# Altium PCB 枪盒主板-20201219.PcbDoc (part 1 of 2)
Units mm, origin at the board's own origin, x right, y up, seen from the top; angles counter-clockwise.
Board outline 78 x 44 mm, 2 copper layers (Top Layer, Bottom Layer); 79 components, 65 nets, 287 pads, 240 vias.
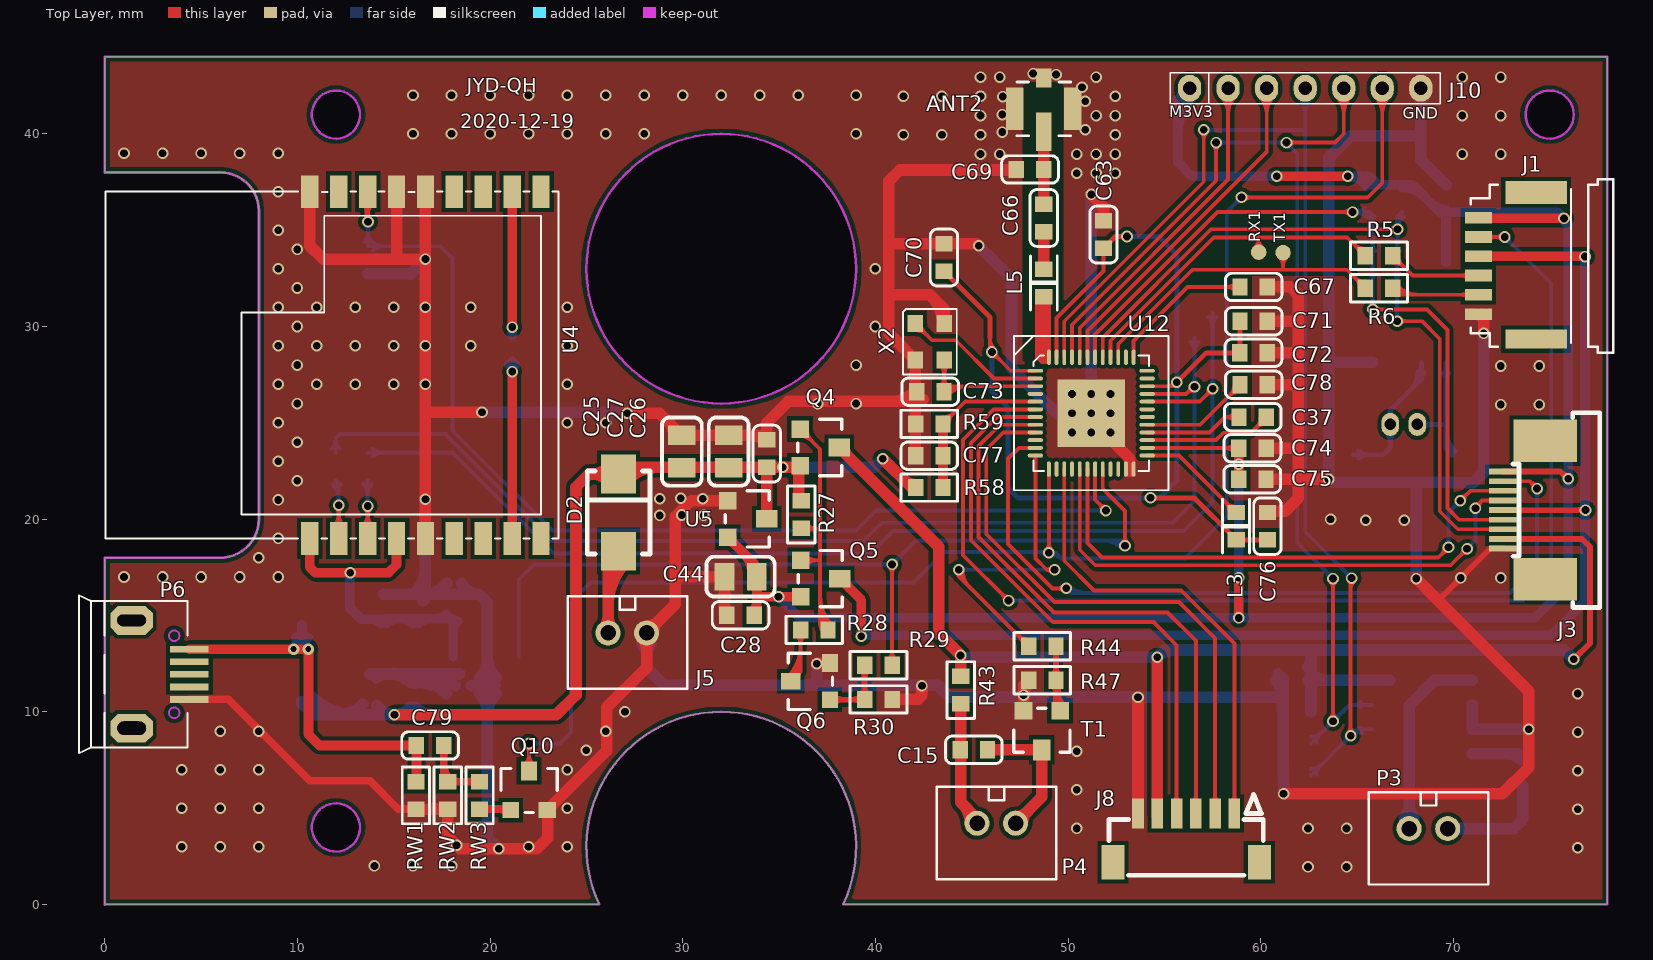
[diagram p0: Top Layer view]
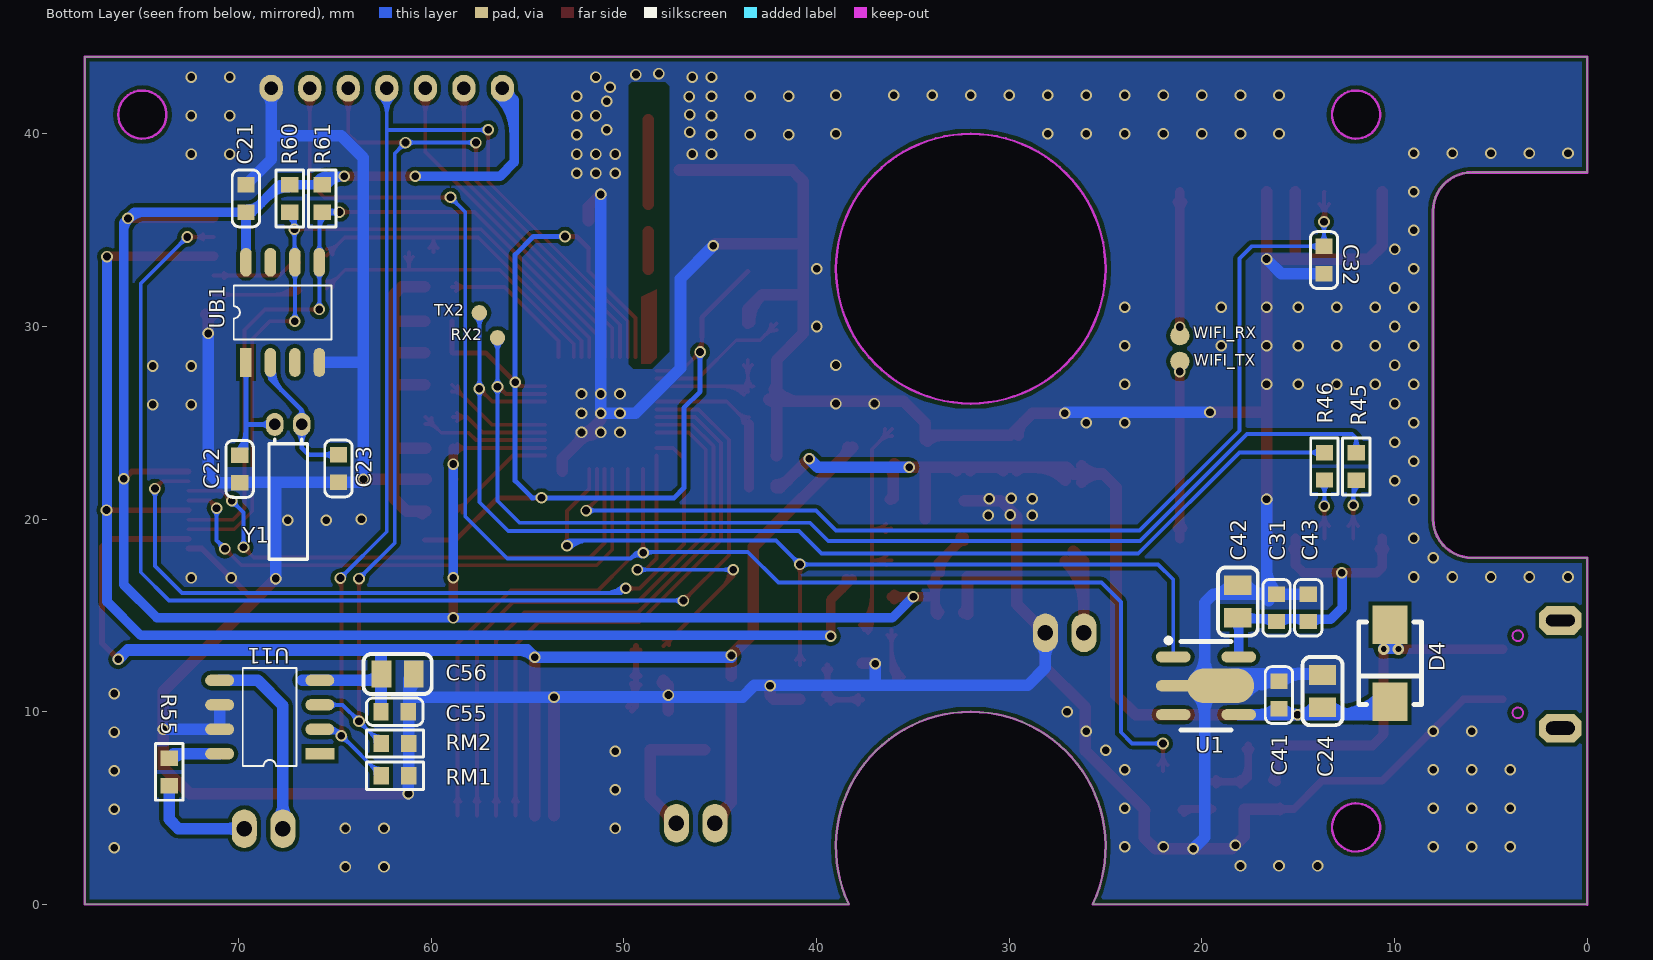
[diagram p1: Bottom Layer view, seen from below]
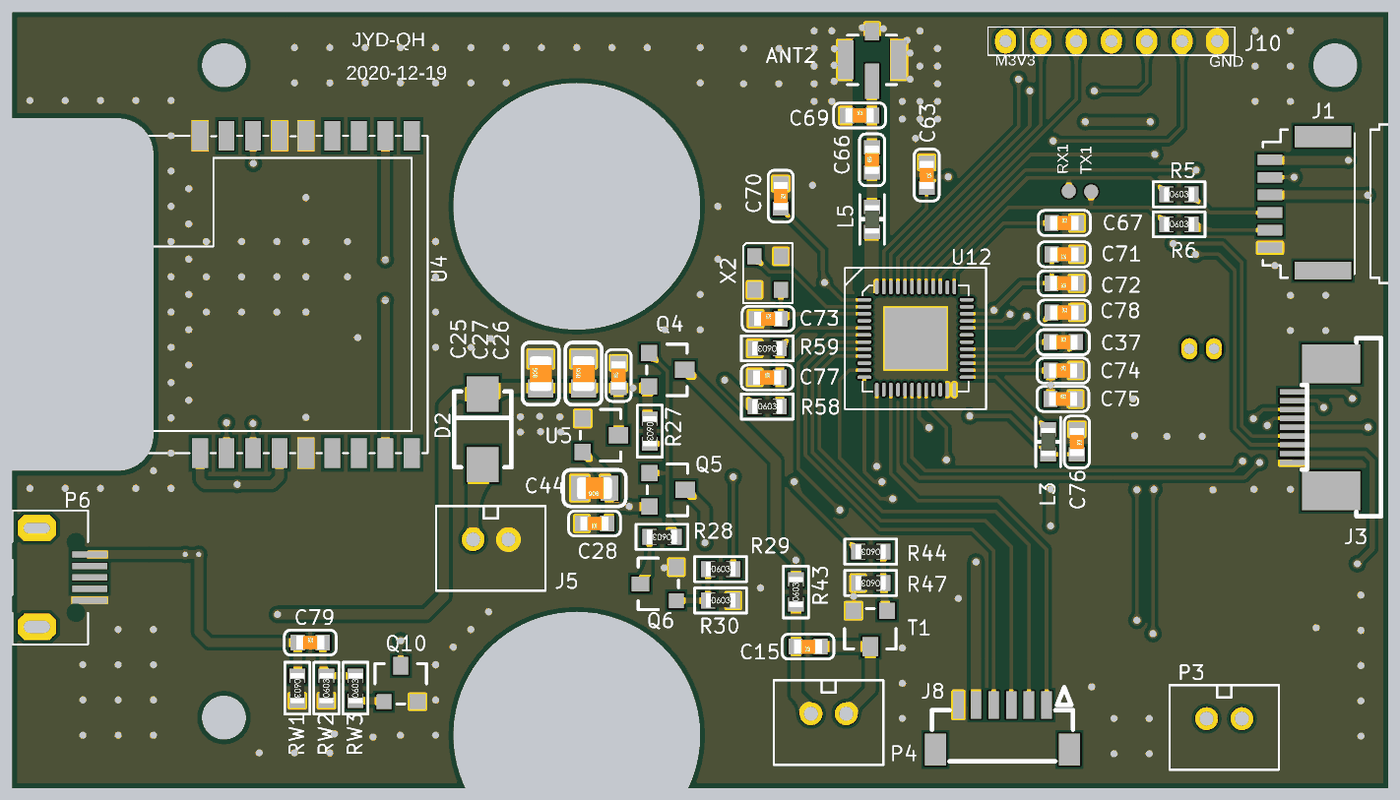
[diagram p3: 3D render of the assembled board from above, using the file's embedded part models]
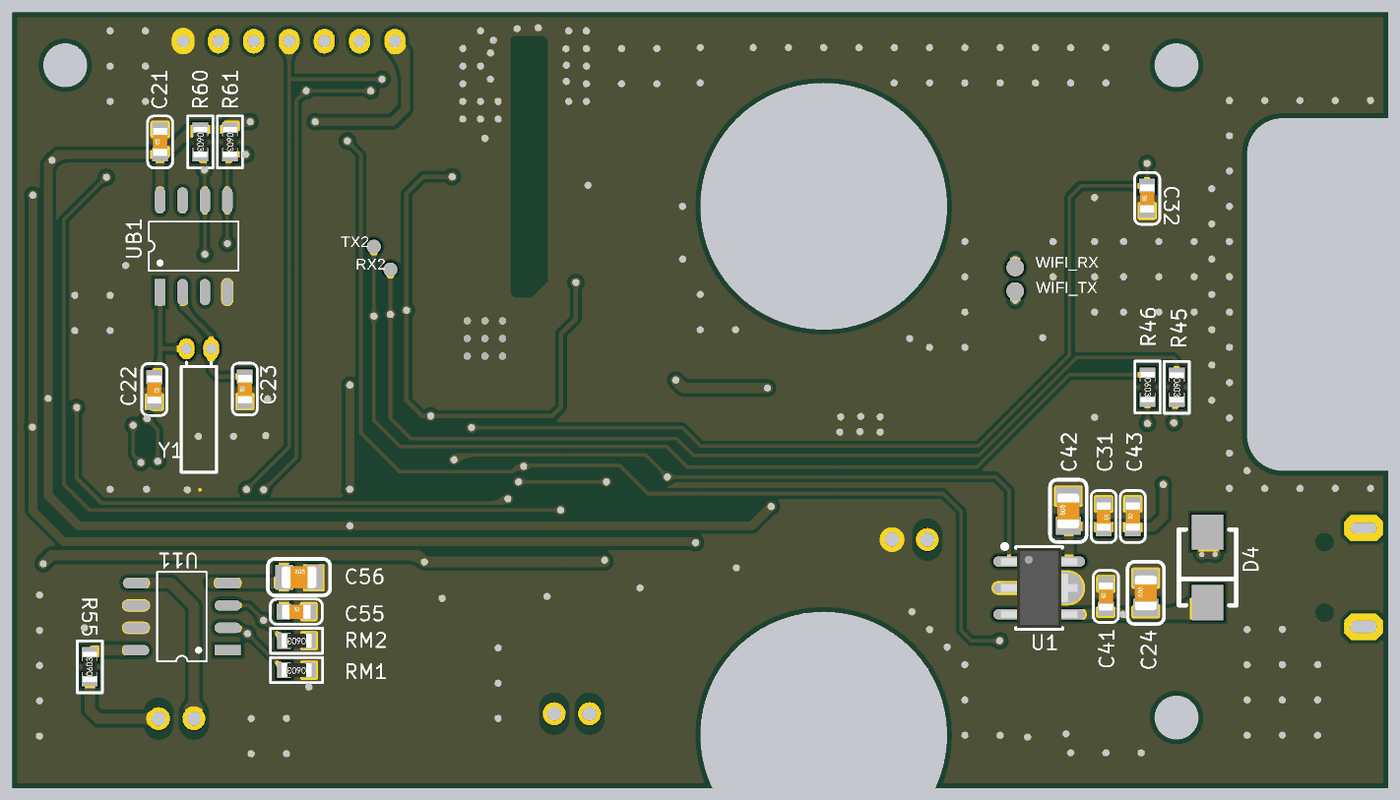
[diagram p4: 3D render of the assembled board from below, using the file's embedded part models]

## Layer stack, top to bottom
Top Layer: signal copper 0.0356
Dielectric: dielectric 0.32, FR-4, Dk 4.8
Bottom Layer: signal copper 0.0356

## Board outline
0,0 0,18 6,18 ccw(c6,20) 8,20 8,36 ccw(c6,36) 6,38 0,38 0,44 78,44 78,0 38.325,0 ccw(c32,3) 25.675,0
cut-out: 32,26 cw(c32,33) 25,33 cw(c32,33) 32,40 cw(c32,33) 39,33 cw(c32,33)
cut-out: 75,39.75 cw(c75,41) 73.75,41 cw(c75,41) 75,42.25 cw(c75,41) 76.25,41 cw(c75,41)
cut-out: 12,39.75 cw(c12,41) 10.75,41 cw(c12,41) 12,42.25 cw(c12,41) 13.25,41 cw(c12,41)
cut-out: 12,2.75 cw(c12,4) 10.75,4 cw(c12,4) 12,5.25 cw(c12,4) 13.25,4 cw(c12,4)

## Design rules (kind name [scope] priority, off if disabled: settings)
Clearance Clearance_1 [All] p1: gap=0.1
Clearance [All] p2 off: gap=0.2
ComponentClearance [All] p1: gap=0 collisioncheckmode=3 verticalgap=0 showdistances=FALSE
HoleSize [All] p1: absolutevalues=TRUE maxlimit=10 minlimit=0.025 maxpercent=80.000 minpercent=20.000
HoleToHoleClearance [All] p1: gap=0 allowstackedmicrovias=TRUE
MinimumSolderMaskSliver [All] p1: minsoldermaskwidth=0
PolygonConnect [All] p1: connectstyle=Direct reliefconductorwidth=0.254 reliefentries=4 polygonreliefangle="90 Angle" airgapwidth=0.254
RoutingVias [All] p1: holewidth=0.4 width=0.6 viastyle="Through Hole" minholewidth=0.3 minwidth=0.5 maxholewidth=0.4 maxwidth=0.6
ShortCircuit [All] p1: allowed=TRUE
SilkToSilkClearance [All] p1: silktosilkclearance=0
SilkToSolderMaskClearance [IsPad] p1: minsilkscreentomaskgap=0 clearancetoexposedcopper=TRUE
SolderMaskExpansion [All] p1: expansion=0.102
Width [All] p1: maxlimit=2 minlimit=0.1 preferedwidth=0.2
21 further rules are at their usual default settings.

## Classes and differential pairs
component class 枪盒主板: ANT2 C15 C21 C22 C23 C24 C31 C32 C37 C41 C42 C43 C55 C56 C63 C66 C67 C69 C70 C71 C72 C73 C74 C75 C76 C77 C78 C79 J1 J3 J5 J8 J10 L3 L5 P3 P4 P6 Q10 R5 R6 R43 R44 R45 R46 R47 R55 R58 R59 R60 R61 RM1 RM2 RW1 RW2 RW3 T1 U1 U4 U11 U12 UB1 X2 Y1

## Components (designator, comment, footprint, x,y, rotation, side; value= is the part's Value field where it differs from the comment)
ANT2 "ANT" ANT 48.742,41.301 r0 top
C15 "10uF/10V" 0603C 45.11,8.027 r180 top
C21 "0.1uF" 0603C 69.621,36.65 r90 bottom
C22 "22pF" 0603C 69.951,22.607 r270 bottom
C23 "22pF" 0603C 64.82,22.632 r90 bottom
C24 "10uF/16V" 0805C 13.741,11.074 r90 bottom
C25 "10uF/16V" 0805C 29.955,23.508 r90 top
C26 "100nF" 0603C 34.366,23.406 r90 top
C27 "220uF/10V" 0805C 32.385,23.508 r90 top
C28 "100nF" 0603C 33.007,15.012 r180 top
C31 "10uF" 0603C 16.129,15.402 r270 bottom
C32 "10uF" 0603C 13.665,33.452 r90 bottom
C37 "100nF" 0603C 59.588,25.299 r0 top
C41 "100nF" 0603C 16.002,10.871 r90 bottom
C42 "22uF/10V" 0805C 18.136,15.723 r90 bottom
C43 "100nF" 0603C 14.478,15.402 r90 bottom
C44 "10uF/16V" 0805C 33.007,17.018 r180 top
C55 "0.1uF" 0603C 61.899,10.008 r180 bottom
C56 "22uF" 0805C 61.747,11.964 r180 bottom
C63 "1uF" 0603C 51.841,34.773 r270 top
C66 "1.5pF" 0603C 48.742,35.637 r90 top
C67 "100nF" 0603C 59.639,32.055 r0 top
C69 "1pF" 0603C 48.031,38.151 r0 top
C70 "100nF" 0603C 43.56,33.579 r270 top
C71 "100nF" 0603C 59.639,30.277 r180 top
C72 "1uF" 0603C 59.624,28.636 r180 top
C73 "12pF" 0603C 42.849,26.62 r0 top
C74 "100nF" 0603C 59.573,23.683 r0 top
C75 "10uF" 0603C 59.562,22.073 r0 top
C76 "10uF" 0603C 60.35,19.635 r270 top
C77 "1nF" 0603C 42.798,23.292 r0 top
C78 "100nF" 0603C 59.639,26.975 r0 top
C79 "10uF" 0603C 16.891,8.255 r0 top
D2 "SS14" DO-214AA 26.67,20.345 r270 top
D4 "SS14" DO-214AA 10.236,12.522 r90 bottom
J1 "" SM06B-SRSS-TB 71.297,33.148 r90 top
J3 "触摸板接口" FPC-0.5-9P 73.685,20.473 r90 top
J5 "电池盒" B2B-PH 27.127,14.097 r0 top
J8 "设置板接口" 6P-1mm 56.133,3.455 r0 top
J10 "7P" 7P-2.0MM 56.311,42.368 r0 top
L3 "2.2UH" 0603L 58.724,19.635 r270 top
L5 "2nH" 0603L 48.742,32.259 r270 top
P3 "电机接口" B2B-PH 68.706,3.938 r0 top
P4 "蜂鸣器接口" B2B-PH 46.278,4.217 r0 top
P6 "MICROUSB" MICRO-USB_F-B 2.794,11.95 r270 top locked
Q4 "SI2301" "SOT-23 - GDS" 37.109,23.724 r270 top
Q5 "SI2301" "SOT-23 - GDS" 37.135,16.916 r270 top
Q6 "PMBT3904" "SOT-23 - BCE" 36.627,11.582 r90 top
Q10 "PMBT3904" "SOT-23 - BCE" 22.022,5.918 r0 top
R5 "22R" 0603R 66.141,33.681 r0 top
R6 "22R" 0603R 66.141,31.979 r0 top
R27 "100K" 0603R 36.144,20.244 r270 top
R28 "1K" 0603R 36.83,14.249 r180 top
R29 "4.7K" 0603R 40.157,12.421 r0 top
R30 "10K" 0603R 40.157,10.643 r0 top
R43 "10R" 0603R 44.424,11.126 r90 top
R44 "200R" 0603R 48.666,13.412 r180 top
R45 "22R" 0603R 11.989,22.733 r270 bottom
R46 "22R" 0603R 13.641,22.744 r270 bottom
R47 "10K" 0603R 48.666,11.634 r180 top
R55 "2.2R" 0603R 73.609,6.884 r90 bottom
R58 "510%1" 0603R 42.798,21.641 r0 top
R59 "100K%1" 0603R 42.798,24.943 r180 top
R60 "10K" 0603R 67.34,36.65 r270 bottom
R61 "10K" 0603R 65.658,36.65 r270 bottom
RM1 "10K" 0603R 61.885,6.691 r0 bottom
RM2 "10K" 0603R 61.885,8.356 r0 bottom
RW1 "100K" 0603R 16.154,5.664 r270 top
RW2 "100K" 0603R 17.805,5.664 r90 top
RW3 "100R" 0603R 19.456,5.664 r90 top
T1 "SS8050" SOT-23-3L 48.64,9.043 r180 top
U1 "ME6217C33P5" LC-SOT-89-5 19.787,11.354 r0 bottom
U4 "TYWE1S" WIFI_Module_TYWE1S 23.546,18.999 r90 top
U5 "HT7533-1" SOT-23-3L 33.35,20.015 r270 top
U11 "CP2117" SOP8 68.387,9.728 r0 bottom
U12 "BK3435QFN48_A" QFN48_6*6*0.4 51.206,25.502 r0 top
UB1 "PCF8563" SOP8 67.716,30.735 r90 bottom
X2 "16MHZ" XTAL3225 42.824,29.211 r270 top
Y1 "32.768KHZ" 晶振-9 66.725,24.918 r0 bottom

## Footprints (in the part's own frame and the unit in brackets; to place one, negate y for a bottom-side part, rotate by r counter-clockwise, add the part's x,y. Pads: shape width x height; smd on the part's side, far side on the other; paste and mask are expansions set on the pad)
6P-1mm [mm]
  rect 0.6x1.55 smd: 1(2.5,1.262) 2(1.5,1.262) 3(0.5,1.262) 4(-0.5,1.262) 5(-1.5,1.262) 6(-2.5,1.262)
  rect 1.2x1.8 smd: 7(-3.8,-1.262) 8(3.8,-1.262)
  silkscreen extent -4,-1.94 4,2.26
7P-2.0MM [mm]
  oval 1.2x1.4 hole 0.7 mask+0.05: 1(0,0) 2(2,0) 3(4,0) 4(6,0) 5(8,0) 6(10,0) 7(12,0)
  silkscreen extent -1,-0.8 13,0.8
0603C [mm]
  rect 0.8x0.9 smd: 1(-0.711,0) 2(0.711,0)
  silkscreen extent -1.47,-0.71 1.47,0.71, body extent -0.8,-0.4 0.8,0.4, height 0.3
0603L [mm]
  rect 0.8x0.9 smd: 1(-0.711,0) 2(0.711,0)
  silkscreen extent -1.4,-0.7 1.4,0.7, body extent -0.82,-0.41 0.83,0.41, height 0.46
0603R [mm]
  rect 0.8x0.9 smd: 1(-0.711,0) 2(0.711,0)
  silkscreen extent -1.47,-0.71 1.47,0.71, body extent -0.85,-0.4 0.85,0.4, height 0.56
0805C [mil]
  rect 40x56 smd: 1(-33,0) 2(33,0)
  silkscreen extent -70,-41 70,41, body extent -39,-25 39,25, height 30
ANT [mm]
  rect 0.8x2 smd: 1(0,-1.2)
  rect 0.9x2.2 smd: 2(-1.5,0) 3(1.5,0)
  rect 0.8x1 smd: 4(0,1.6)
  silkscreen extent -1.4,-1.4 1.4,1.4
B2B-PH [mm]
  round 1.3 / inner oval 1.3x2 / far side oval 1.3x2 hole 0.8 mask+0.05: 1(-1,0) 2(1,0)
  silkscreen extent -3.1,-2.9 3.1,1.9
DO-214AA [mm]
  rect 2x1.8 smd: 1(2,0) 2(-2,0)
  silkscreen extent -2.15,-1.63 2.15,1.63
FPC-0.5-9P [mil]
  rect 11.8x59 smd: 1(-78.72,42.72) 2(-59.02,42.72) 3(-39.32,42.72) 5(-0.02,42.72) 6(19.67,42.72) 7(39.35,42.72) 8(59.03,42.72) 9(78.72,42.72)
  rect 11.9x59 smd: 4(-19.67,42.72)
  rect 86.6x129.9 smd: 10(-141.72,-42.73) 11(141.72,-42.73)
  silkscreen extent -199,-154 199,23
LC-SOT-89-5 [mm]
  oval 1.8x0.58 smd: 1(1.7,-1.5) 3(1.7,1.5) 4(-1.7,1.5) 5(-1.7,-1.5)
  oval 3.5x1.8 smd: 2(-0.75,0)
  oval 2.4x0.58 smd: 2(1.4,0)
  silkscreen extent -1.3,-2.47 2.07,2.3, body extent -2.17,-2.25 2.18,2.25, height 1.5
MICRO-USB_F-B [mm]
  rect 0.36x2 smd mask+0.05: 1(-1.3,1.6) 2(-0.65,1.6) 3(0,1.6) 4(0.65,1.6) 5(1.3,1.6)
  oct 1.5x2.2 hole 0.7 slot 1.5 at 90 deg mask+0.05: 6(2.8,-1.4)
  oct 1.5x2.2 hole 0.6 slot 1.5 at 90 deg mask+0.05: 7(-2.8,-1.4)
  Keep-Out Layer circle w0.1: c-2,0.813 r0.275
  Keep-Out Layer circle w0.1: c2,0.813 r0.275
  silkscreen extent -4.1,-4.14 4.1,1.5
QFN48_6*6*0.4 [mm]
  rect 3.5x3.5 smd: 0(0,0)
  oval 0.8x0.2 smd: 1(-2.9,2.2) 2(-2.9,1.8) 3(-2.9,1.4) 4(-2.9,1) 5(-2.9,0.6) 6(-2.9,0.2) 7(-2.9,-0.2) 8(-2.9,-0.6) 9(-2.9,-1) 10(-2.9,-1.4) 11(-2.9,-1.8) 12(-2.9,-2.2) 25(2.9,-2.2) 26(2.9,-1.8) 27(2.9,-1.4) 28(2.9,-1) 29(2.9,-0.6) 30(2.9,-0.2) 31(2.9,0.2) 32(2.9,0.6) 33(2.9,1) 34(2.9,1.4) 35(2.9,1.8) 36(2.9,2.2)
  oval 0.2x0.8 smd: 13(-2.2,-2.9) 14(-1.8,-2.9) 15(-1.4,-2.9) 16(-1,-2.9) 17(-0.6,-2.9) 18(-0.2,-2.9) 19(0.2,-2.9) 20(0.6,-2.9) 21(1,-2.9) 22(1.4,-2.9) 23(1.8,-2.9) 24(2.2,-2.9) 37(2.2,2.9) 38(1.8,2.9) 39(1.4,2.9) 40(1,2.9) 41(0.6,2.9) 42(0.2,2.9) 43(-0.2,2.9) 44(-0.6,2.9) 45(-1,2.9) 46(-1.4,2.9) 47(-1.8,2.9) 48(-2.2,2.9)
  silkscreen extent -4,-4 4,4
SM06B-SRSS-TB [mm]
  rect 0.6x1.4 smd paste+0: 1(-2.5,0) 2(-1.5,0) 3(-0.5,0) 4(0.5,0) 5(1.5,0) 6(2.5,0)
  rect 1x3.2 smd paste+0: A(-3.8,-3)
  rect 1.2x3.2 smd: B(3.8,-3)
  silkscreen extent -4.5,-7 4.5,0.4
SOP8 [mm]
  rect 1.5x0.6 smd mask+0.05: 1(-2.6,1.905)
  oval 1.5x0.6 smd mask+0.05: 2(-2.6,0.635) 3(-2.6,-0.635) 4(-2.6,-1.905) 5(2.6,-1.905) 6(2.6,-0.635) 7(2.6,0.635) 8(2.6,1.905)
  round 0.4 on Bottom Overlay mask+0.05: ""(-0.949,1.905)
  silkscreen extent -1.4,-2.54 1.4,2.54
"SOT-23 - BCE" [mm]
  rect 0.85x0.85 smd: B(-0.95,-1.016)
  rect 0.85x1 smd: C(0,1.016)
  rect 0.914x0.85 smd: E(0.95,-1.016)
  silkscreen extent -1.46,-1.14 1.46,1.14
"SOT-23 - GDS" [mil]
  rect 36x43.31 smd: D(0,40)
  rect 36x36 smd: G(-37.4,-40) S(37.4,-40)
  silkscreen extent -57,-45 58,45
SOT-23-3L [mil]
  rect 36x36 smd: 1(-37.4,-40) 2(37.4,-40)
  rect 36x43.31 smd: 3(0,40)
  silkscreen extent -57,-45 58,45
WIFI_Module_TYWE1S [mm] "W:18mm*"
  rect 1.7x0.9 smd mask+0.05: 1(0,12.9) 2(0,11.4) 3(0,9.9) 4(0,8.4) 5(0,6.9) 6(0,5.4) 7(0,3.9) 8(0,2.4) 9(0,0.9) 10(18,0.9) 11(18,2.4) 12(18,3.9) 13(18,5.4) 14(18,6.9) 15(18,8.4) 16(18,9.9) 17(18,11.4) 18(18,12.9)
  silkscreen extent 0,0 18,23.5
XTAL3225 [mm]
  rect 0.9x0.8 smd: 1(-0.95,-0.75) 2(0.95,-0.75) 3(0.95,0.75) 4(-0.95,0.75)
  silkscreen extent -1.7,-1.4 1.7,1.4
晶振-9 [mm]
  oval 0.9x1.2 hole 0.6: 1(0,0) 2(1.4,0)
  rect 0x0 smd: 3(0.635,8)
  silkscreen extent -0.3,0.76 1.7,7

## Part data
ANT2: library part Socket
C15: library part C_0
C24 C25 C27 C42 C44: library part CAP-P, "Capacitor, tolerance"
C26 C41: library part C
C28 C43 C55 C56 C79: library part CAP-NP, "Capacitor, Ce"
C31: library part Cap, "10uF/6.3V X5R"
C32: library part Cap, "10uF/6.3V X5"
C37 C63 C66 C67 C69 C70 C71 C72 C73 C74 C75 C76 C78: library part Cap, "Cap"
C77: library part CAP-NP, "Capacitor, C"
J1: library part Con_SMD_125L_6, "Connecter 1.2"
J3: library part "Header 9", "Head"
J5: library part "Header 2", "Header,"
J8: library part "Header 6", "Heade"
L3 L5: "Power Inductor, 4.7uH, 0.7A, 260"
P3 P4 P6: library part MHDR1X2, "Header,"
Q4 Q5: library part PWRMOSFET_EP_
Q6 Q10: library part PMB
R5 R6 R58 R59: library part Res2, "Re"
R43 R44 R47 R60 R61: library part R
R45 R46: library part Res2, "Res"
RM1 RM2: library part Pro71C3.TMP_UnNa
T1: library part NPN_BJT, "Bipolar Junction Trans"
U4: library part WIFI
U5: library part XC6206
U11: library part AM24L
U12: library part EFR32BG1

## Free pads (board coordinates)
  round 1 smd far side: 1(21.146,29.527) 2(21.146,28.194)
  round 0.8 smd: 6(59.893,33.859) 7(61.163,33.833)
  round 0.8 smd far side: 9(56.565,29.414) 10(57.505,30.709)

## Via types
v1: diameter 0.6, hole 0.4, Top Layer to Bottom Layer, tented both sides, 238 vias
v2: diameter 0.6, hole 0.3, Top Layer to Bottom Layer, tented both sides, 2 vias

## Nets (pads, with @x,y where several pads share a name; then routed paths per layer and width w, separated by ;. In a path a pad name is that pad's centre, name@x,y a point inside that pad or via, vN(x,y) a via of type N, cw(c..) or ccw(c..) an arc to the next point about the centre after c; other vN are vias at no path point)
3V3: C31.2 C42.1 C43.1 U1.5 U4.1 U4.4 | length 22.4
  Top Layer w0.5: U4.1@10.504,18.458 cw(c10.163,18.116) 10.646,18.116 cw(c11.129,18.116) U4.1@10.787,18.458 ; U4.1@10.646,18.999 10.646,17.497 10.922,17.221 v1(12.751,17.221) 14.732,17.221 15.146,17.635 U4.4@15.146,18.999 ; U4.4@15.004,18.458 cw(c14.663,18.116) 15.146,18.116 cw(c15.629,18.116) U4.4@15.287,18.458
  Bottom Layer w0.5: v1(12.751,17.221) 12.725,17.221 12.725,15.392 13.31,14.808 14.361,14.808 C43.1@14.478,14.691 ; 13.782,14.808 cw(c13.782,14.045) C43.1@14.322,14.585 ; C43.1@14.623,14.835 18.087,14.835 U1.5@18.087,12.854 ; C43.1@14.634,14.585 cw(c15.239,13.98) 15.239,14.835 ; 15.368,14.835 cw(c15.368,13.98) C31.2@15.973,14.585 ; C31.2@16.285,14.585 cw(c16.89,13.98) 16.89,14.835 ; 17.191,14.835 ccw(c17.191,15.626) C42.1@17.75,15.067 ; 18.087,14.143 cw(c18.877,14.143) C42.1@18.318,14.702
ADC_BAT: C77.2 R58.2 R59.1 U12.5 | length 9.7
  Top Layer w0.2: R59.1@43.51,24.943 44.668,26.102 U12.5@48.306,26.102 ; R59.1@43.51,25.293 ccw(c43.51,26.138) 44.107,25.541 ; R59.1@43.81,24.993 cw(c44.413,24.993) 43.986,25.42
  Top Layer w0.5: R58.2@43.51,21.641 C77.2@43.51,23.292 R59.1@43.51,24.943
ANT: ANT2.1 C66.2 C69.2 | length 4.4
  Top Layer w0.6: C66.2@48.742,36.348 ANT2.1@48.742,40.736
BEEP: R44.2 U12.12 | length 22.3
  Top Layer w0.2: v1@44.23,17.197 cw(c44.15,17.044) 44.322,17.044 ; v1@44.415,17.197 ccw(c44.495,17.044) 44.322,17.044 ; v1@44.522,17.374 ccw(c45.803,17.374) 44.897,16.469 ; 44.556,16.81 cw(c45.12,17.374) v1(44.322,17.374) 44.322,17.044 ; 47.357,14.009 ccw(c47.955,14.607) R44.2@47.955,13.762 ; 47.478,13.888 cw(c47.051,13.462) R44.2@47.655,13.462 ; R44.2@47.955,13.412 44.322,17.044 ; U12.12@48.306,23.302 48.306,17.963 48.894,17.374 ; v1@49.142,17.252 ccw(c48.895,17.061) 48.895,17.374 ; v1@49.142,17.496 cw(c48.895,17.687) 48.895,17.374 ; v1(49.301,17.374) 48.894,17.374
  Bottom Layer w0.2: v1(44.322,17.374) v1(49.301,17.374) ; v1@44.464,17.233 cw(c44.805,16.891) 44.805,17.374 cw(c44.805,17.857) v1@44.464,17.516 ; v1@49.159,17.233 ccw(c48.818,16.891) 48.818,17.374 ccw(c48.818,17.857) v1@49.159,17.516
CE(RST): U12.16
CHIP_EN: C32.2 U4.16 U12.19 | length 62.7
  Top Layer w0.2: U4.16@13.398,36.352 cw(c12.754,35.707) v1@13.665,35.707 ; v1@13.497,35.541 ccw(c12.966,35.881) 13.575,36.044 ; v1@13.524,35.574 ccw(c13.182,35.916) 13.665,35.916 ccw(c14.148,35.916) v1@13.807,35.574 ; U4.16@13.646,36.999 13.665,36.98 v1(13.665,35.433) ; 13.653,35.752 ccw(c13.885,35.814) v1@13.765,35.606 ; 13.665,35.801 cw(c14.444,35.801) U4.16@13.893,36.352 ; U12.19@51.406,22.602 51.406,21.01 v1(51.968,20.448) ; v1@51.768,20.448 ccw(c51.285,20.448) 51.626,20.789 ccw(c51.968,21.13) v1@51.968,20.648
  Bottom Layer w0.2: C32.2@13.453,34.375 ccw(c12.941,34.887) 13.665,34.887 ccw(c14.389,34.887) C32.2@13.877,34.375 ; v1@13.524,35.292 cw(c13.182,34.95) 13.665,34.95 cw(c14.148,34.95) v1@13.807,35.292 ; v1(13.665,35.433) C32.2@13.665,34.163 17.424,34.163 18.059,33.528 18.059,24.587 23.241,19.406 38.989,19.406 40.031,20.448 v1(51.968,20.448) ; C32.2@13.927,33.951 cw(c14.439,33.439) 14.439,34.163 cw(c14.439,34.887) C32.2@13.927,34.375 ; v1@51.826,20.306 ccw(c51.485,19.965) 51.485,20.448 ccw(c51.485,20.93) v1@51.826,20.589
DET_KEY: J8.4 U12.7 | length 31.5
  Top Layer w0.2: U12.7@48.306,25.302 46.305,25.302 45.192,24.189 44.958,23.955 44.958,18.905 49.206,14.656 54.432,14.656 55.634,13.454 J8.4@55.634,4.616 ; J8.4@55.492,5.334 ccw(c55.151,5.675) 55.634,5.675 ccw(c56.116,5.675) J8.4@55.775,5.334
DET_SW: J8.3 U12.8 | length 31.5
  Top Layer w0.2: U12.8@48.306,24.902 46.47,24.902 45.358,23.789 45.358,19.07 49.264,15.164 55.162,15.164 56.634,13.693 J8.3@56.634,4.616 ; J8.3@56.492,5.334 ccw(c56.151,5.675) 56.634,5.675 ccw(c57.116,5.675) J8.3@56.775,5.334
GND: ANT2.2 ANT2.3 ANT2.4 C21.2 C22.2 C23.1 C24.2 C25.2 C26.2 C27.2 C28.2 C31.1 C32.1 C41.2 C42.2 C43.2 C44.2 C55.2 C56.2 C63.1 C67.2 C69.1 C70.1 C71.1 C72.1 C73.1 C74.2 C75.2 C76.1 C77.1 C78.2 J1.1 J3.1 J5.2 J8.6 J10.7 P6.5 Q6.E Q10.E R30.2 R47.2 R59.2 RM1.1 RM2.1 RW1.2 RW2.1 T1.2 U1.2 U4.5 U4.14 U4.15 U4.18 U5.1 U11.6 U11.7 U12.0 U12.23 U12.24 UB1.4 X2.2 X2.4 | length 405.9
  Top Layer w0.3: 69.189,15.799 69.24,15.799 71.914,18.473 J3.1@72.6,18.473 ; v1@70.24,16.95 cw(c69.878,16.95) 70.134,16.694 cw(c70.39,16.438) v1@70.39,16.8 ; v1@70.39,17.1 ccw(c70.39,17.462) 70.646,17.206 ccw(c70.902,16.95) v1@70.54,16.95 ; J3.1@71.853,18.413 cw(c72,18.266) J3.1@72,18.474
  Top Layer w0.4: P6.5@4.394,10.65 6.419,10.65 10.643,6.426 13.767,6.426 15.24,4.953 RW1.2@16.154,4.953 ; 7.781,9.288 cw(c7.492,9) v1@7.9,9 ; v1@8,8.9 cw(c8,8.492) 8.288,8.781 ; RW1.2@15.963,4.812 ccw(c15.622,4.47) 15.622,4.953 ccw(c15.622,5.436) RW1.2@15.963,5.094
  Top Layer w0.6: U4.18@10.646,36.999 10.646,34.192 11.335,33.503 15.138,33.503 ; U4.15@15.146,36.999 15.146,33.51 15.138,33.503 ; RW1.2@16.154,4.953 RW2.1@17.805,4.953 17.805,3.531 v1(18.263,3.073) ; v1@16.637,33.503 15.138,33.503 ; U4.5@16.646,18.999 v1(16.646,21.031) 16.646,25.552 ; U4.14@16.646,36.999 v1(16.646,33.503) v1(16.646,31) v1(16.646,29) v1(16.646,27) 16.646,25.552 ; 18.692,2.896 cw(c18.692,3.503) v1(18.263,3.073) ; v1(19.583,25.552) 16.646,25.552 ; v1(27.127,25.502) 28.799,25.502 C25.2@29.955,24.346 34.137,24.346 C26.2@34.366,24.117 34.366,24.993 35.484,26.111 42.048,26.111 42.074,26.137 42.074,23.306 C77.1@42.087,23.292 ; J5.2@27.88,13.85 cw(c27.282,13.252) 28.127,13.252 cw(c28.972,13.252) J5.2@28.375,13.85 ; J5.2@28.127,14.447 ccw(c28.127,15.292) 28.725,14.694 ccw(c29.322,14.097) J5.2@28.477,14.097 ; 29.253,25.048 cw(c28.551,24.346) C25.2@29.544,24.346 ; 29.642,16.866 29.795,17.018 C44.2@32.169,17.018 C28.2@32.169,15.062 ; 32.169,15.61 ccw(c32.844,15.61) C28.2@32.367,15.132 ; U5.1@32.334,20.965 30.439,20.965 29.616,20.142 29.616,15.586 J5.2@28.127,14.097 28.127,12.303 26.06,10.236 26.06,7.991 Q10.E@22.972,4.902 22.987,4.887 22.987,3.454 22.428,2.896 v1(20.447,2.896) 18.44,2.896 v1(18.263,3.073) ; 33.523,24.346 cw(c33.523,23.324) C26.2@34.245,24.046 ; v1(36.957,12.497) 36.993,12.532 Q6.E@37.643,12.532 ; 40.79,26.111 ccw(c40.79,27.918) C73.1@42.067,26.64 ; R30.2@40.869,10.643 42.215,10.643 ; C73.1@42.074,26.62 X2.2@42.074,28.261 40.69,29.644 40.69,31.649 ; C73.1@42.074,27.066 ccw(c42.535,27.066) C73.1@42.209,26.74 ; 42.238,26.111 ccw(c42.238,26.47) C73.1@42.492,26.216 ; 42.916,31.556 cw(c41.571,30.211) X2.4@43.474,30.211 ; X2.4@43.574,30.161 43.574,30.899 42.824,31.649 40.69,31.649 ; v1(45.364,34.188) 45.262,34.291 C70.1@43.56,34.291 40.69,34.291 ; C69.1@47.116,38.126 41.274,38.126 40.69,37.542 40.69,34.291 ; T1.2@47.69,10.059 v1(47.69,10.872) ; v1@47.69,10.824 cw(c48.564,10.824) R47.2@48.017,11.506 ; v1(51.206,24.502) cw(c51.206,22.936) U12.0@52.313,24.044 ; v1(51.206,25.502) 51.206,25.151 53.206,23.151 53.206,22.502 ; v1(51.206,36.856) 51.841,36.221 C63.1@51.841,35.484 ; U12.0@51.606,24.751 ccw(c52.206,25.351) v1(52.206,24.502) ; U12.0@51.633,24.382 ccw(c51.804,24.993) v1(52.206,24.502) ; U12.0@52.369,23.999 cw(c52.663,24.373) v1(52.206,24.502) ; U12.0@52.454,23.902 cw(c53.054,24.502) v1(52.206,24.502) ; J8.6@53.634,4.616 v1(53.634,10.759) ; C75.2@60.274,22.073 61.925,22.073 ; C76.1@60.284,20.411 61.279,20.411 61.95,21.083 61.95,22.073 ; C74.2@60.284,23.683 61.941,23.683 ; C72.1@60.335,28.636 61.941,28.636 61.95,28.626 ; C78.2@60.35,26.975 61.925,26.975 61.95,27.001 ; C71.1@60.35,30.277 61.925,30.277 ; C67.2@60.35,32.055 61.544,32.055 61.95,31.649 61.95,28.626 ; C76.1@60.471,20.275 cw(c60.799,19.947) C76.1@60.799,20.411 ; v1(61.188,5.741) 72.542,5.741 73.913,7.113 v1(73.913,9.094) 73.913,11.075 69.189,15.799 v1(68.071,16.917) ; v1(63.525,22.073) 61.95,22.073 ; J1.1@71.297,30.648 71.577,30.368 v1(71.577,29.642) ; J1.1@71.577,30.356 cw(c71.988,30.356) J1.1@71.697,30.648 ; 40.69,31.649 40.69,34.291 ; 42.215,10.643 ccw(c41.676,11.181) v1(42.418,11.354) 42.418,10.846 42.215,10.643 ; v1(47.69,10.872) cw(c48.608,10.98) R47.2@47.955,11.634 47.69,11.369 v1(47.69,10.872) ; 61.95,22.073 61.95,27.001 ; 61.95,27.001 61.95,28.626 ; C73.1@42.074,26.173 cw(c42.535,26.173) 42.209,26.499 ccw(c42.535,26.173) C73.1@42.074,26.173
  Bottom Layer w0.6: C32.1@13.665,32.741 15.884,32.741 v1(16.646,33.503) ; C24.2@13.767,11.963 U1.2@18.427,11.963 ; C24.2@14.092,11.766 cw(c14.569,11.288) 14.569,11.963 ; C43.2@14.478,16.113 16.646,16.113 ; 14.791,11.963 cw(c14.791,10.421) C41.2@15.881,11.512 ; 15.009,11.991 cw(c14.873,10.71) C41.2@15.874,11.52 ; 15.266,11.963 cw(c15.266,8.434) U1.2@17.762,10.93 ; C41.2@15.698,11.936 cw(c15.765,11.87) C41.2@15.765,11.963 ; C41.2@16.08,11.486 cw(c16.385,10.454) 16.899,11.399 ; C31.1@16.108,16.184 ccw(c14.811,17.482) 16.646,17.482 ; C41.2@16.123,11.512 cw(c17.213,10.421) 17.213,11.963 ; C41.2@16.239,11.963 cw(c16.239,11.87) C41.2@16.306,11.936 ; C31.1@16.533,15.76 ccw(c16.259,16.033) 16.646,16.033 ; v1(16.646,21.031) 16.646,16.113 ; 16.715,11.963 cw(c16.715,9.882) U1.2@18.187,11.354 ; C42.2@17.764,16.683 cw(c16.646,17.495) 16.646,16.113 ; C42.2@18.523,16.657 ccw(c19.421,17.127) 19.421,16.113 ; U1.2@19.037,11.354 U1.2@19.253,11.354 ; U1.2@19.462,10.93 cw(c18.496,9.963) 19.863,9.963 ; U1.2@19.462,11.778 ccw(c18.496,12.745) 19.863,12.745 ; v1(19.583,25.552) 27.076,25.552 v1(27.127,25.502) ; 19.863,9.848 cw(c21.393,9.848) U1.2@20.311,10.93 ; 19.863,10.379 cw(c21.251,10.379) U1.2@20.27,11.361 ; 19.863,12.329 ccw(c21.251,12.329) U1.2@20.27,11.347 ; 19.863,12.86 ccw(c21.393,12.86) U1.2@20.311,11.778 ; v1(20.447,2.896) 19.863,3.48 19.863,15.672 19.421,16.113 ; J5.2@27.88,13.5 cw(c27.282,12.902) 28.127,12.902 cw(c28.972,12.902) J5.2@28.375,13.5 ; J5.2@28.127,14.097 28.127,12.284 29.032,11.379 36.957,11.379 ; v1(36.957,12.497) 36.957,11.379 ; v1(45.364,34.188) 47.066,32.487 47.066,27.838 49.402,25.502 v1(50.206,25.502) v1(51.206,25.502) v1(51.206,26.502) v1(51.206,36.856) ; C56.2@60.762,11.614 cw(c59.767,10.619) 61.174,10.619 ; C56.2@60.909,11.964 61.174,11.699 61.174,10.542 ; C55.2@61.095,10.094 ccw(c60.517,10.32) 60.956,10.759 ; RM1.1@61.174,6.691 RM1.1@61.174,7.036 ; v1(61.188,5.741) 61.188,7.022 RM1.1@61.174,7.036 ; 63.525,28.135 UB1.4@65.811,28.135 ; 63.893,21.921 cw(c63.893,22.441) v1(63.525,22.073) ; v1(68.071,16.917) 68.071,21.921 ; J10.7@68.099,42.056 cw(c67.587,41.543) 68.311,41.543 cw(c69.036,41.543) J10.7@68.523,42.056 ; J10.7@68.311,42.368 68.311,39.904 ; C21.2@69.621,37.361 68.311,38.67 68.311,39.904 ; U11.6@70.987,10.363 U11.7@70.987,9.093 v1(73.913,9.094) ; v1(71.577,29.642) 71.577,22.429 71.043,21.895 C22.2@69.951,21.895 69.926,21.921 68.071,21.921 ; 16.646,16.113 19.421,16.113 ; 36.957,11.379 43.231,11.379 43.84,10.77 53.623,10.77 v1(53.634,10.759) 60.956,10.759 ; 60.956,10.759 61.174,10.542 ; RM1.1@61.174,7.036 61.174,10.542 ; v1(63.525,22.073) 63.525,38.761 64.668,39.904 68.311,39.904 ; v1(63.525,22.073) 63.677,21.921 C23.1@64.82,21.921 68.071,21.921
  other v1: 62.457,1.95 64.457,1.95 14,2 16,2 18,2 76.457,2.95 4,3 6,3 8,3 22,3 24,3 50.457,3.95 62.457,3.95 64.457,3.95 76.457,4.95 4,5 6,5 8,5 24,5 50.457,5.95 76.457,6.95 4,7 6,7 8,7 24,7 50.457,7.95 25,8 76.457,8.95 6,9 8,9 26,9 27,10 76.457,10.95 70.39,16.95 72.457,16.95 1,17 3,17 5,17 7,17 9,17 8,18 9,19 65.457,19.95 67.457,19.95 63.627,19.99 28.804,20.193 31.09,20.193 29.947,20.218 9,21 28.804,21.057 31.039,21.057 29.896,21.082 10,22 9,23 10,24 50.206,24.502 9,25 24,25 26,25 52.206,25.502 72.457,25.95 74.457,25.95 10,26 37,26 39,26 50.206,26.502 52.206,26.502 9,27 11,27 13,27 15,27 24,27 72.457,27.95 74.457,27.95 10,28 39,28 9,29 11,29 13,29 15,29 19,29 24,29 10,30 40,30 9,31 11,31 13,31 15,31 19,31 24,31 10,32 9,33 40,33 10,34 9,35 9,37 50.457,37.95 51.457,37.95 52.457,37.95 45.457,38.95 46.457,38.95 50.457,38.95 51.457,38.95 52.457,38.95 70.457,38.95 72.457,38.95 1,39 3,39 5,39 7,39 9,39 41.457,39.95 43.457,39.95 45.457,39.95 52.457,39.95 16,40 18,40 20,40 22,40 24,40 26,40 28,40 39,40 46.592,40.093 50.892,40.209 45.457,40.95 51.457,40.95 52.457,40.95 70.457,40.95 72.457,40.95 46.592,41 50.892,41.697 46.609,41.935 41.457,41.95 43.457,41.95 45.457,41.95 52.457,41.95 16,42 18,42 20,42 22,42 24,42 26,42 28,42 30,42 32,42 34,42 36,42 39,42 50.724,42.418 45.457,42.95 46.457,42.95 51.457,42.95 70.457,42.95 72.457,42.95 49.378,43.078 48.184,43.129
INT_FP: J1.5 U12.6 | length 66.1
  Top Layer w0.2: v1@46.713,15.774 ccw(c46.23,15.774) 46.572,16.115 ccw(c46.913,16.457) v1@46.913,15.974 ; v1(46.913,15.774) 44.558,18.13 44.558,24.121 46.139,25.702 U12.6@48.306,25.702 ; J1.5@71.297,34.648 v1(72.669,34.648) ; J1.5@71.839,34.506 cw(c72.18,34.165) 72.18,34.648 cw(c72.18,35.13) J1.5@71.839,34.789 ; v1@72.527,34.506 ccw(c72.186,34.165) 72.186,34.648 ccw(c72.186,35.13) v1@72.527,34.789
  Bottom Layer w0.2: v1(46.913,15.774) 73.609,15.774 75.082,17.247 75.082,32.235 v1(72.669,34.648) ; v1@47.055,15.632 cw(c47.396,15.291) 47.396,15.774 cw(c47.396,16.257) v1@47.055,15.915 ; v1@72.669,34.448 cw(c72.669,33.965) 73.01,34.306 cw(c73.352,34.648) v1@72.869,34.648
IRQ_RF: U12.4
IRQ_TSM12: J3.8 U12.11 | length 45
  Top Layer w0.2: U12.11@48.306,23.702 47.447,23.702 46.888,23.143 46.888,18.72 49.199,16.409 v1(49.91,16.409) ; v1@49.769,16.267 ccw(c49.428,15.926) 49.428,16.409 ccw(c49.428,16.892) v1@49.769,16.55 ; J3.8@72.6,21.972 73.964,21.972 v1(74.345,21.591) ; v1@74.145,21.591 ccw(c73.662,21.591) 74.004,21.932 ccw(c74.345,22.273) v1@74.345,21.791
  Bottom Layer w0.2: v1@50.052,16.55 ccw(c50.961,17.459) 50.961,16.174 ; 50.478,16.174 cw(c50.478,16.976) v1(49.91,16.409) 50.145,16.174 72.942,16.174 74.345,17.577 v1(74.345,21.591) ; v1@74.204,21.449 cw(c73.862,21.108) 74.345,21.108 cw(c74.828,21.108) v1@74.487,21.449
KEYX_3-35: J8.2 U12.9 | length 31.4
  Top Layer w0.2: U12.9@48.306,24.502 46.636,24.502 45.758,23.624 45.758,19.236 49.296,15.698 55.752,15.698 57.634,13.817 J8.2@57.634,4.616 ; J8.2@57.492,5.334 ccw(c57.151,5.675) 57.634,5.675 ccw(c58.116,5.675) J8.2@57.775,5.334
KEYX_4-35: U12.10
KEYY_1-35: U12.21
KEYY_2-35: U12.30
KEYY_3-35: U12.31
LED_GREEN: J3.6 U12.17 | length 31.9
  Top Layer w0.2: U12.17@50.606,22.602 50.606,18.416 51.415,17.607 69.854,17.607 v1(70.713,18.466) ; v1@70.513,18.466 cw(c70.03,18.466) 70.372,18.125 cw(c70.713,17.783) v1@70.713,18.266 ; v1(71.145,20.575) 71.119,20.6 71.492,20.973 J3.6@72.6,20.973 ; v1@71.145,20.775 ccw(c71.145,21.135) 71.4,20.88 ; v1@71.345,20.586 cw(c71.85,20.614) 71.492,20.973
  Bottom Layer w0.2: v1(70.713,18.466) 71.145,18.898 v1(71.145,20.575) ; v1@70.713,18.666 ccw(c70.713,19.149) 71.055,18.808 ccw(c71.396,18.466) v1@70.913,18.466 ; v1@71.003,20.433 cw(c70.662,20.092) 71.145,20.092 cw(c71.628,20.092) v1@71.286,20.433
LED_RED: J3.7 U12.18 | length 31.3
  Top Layer w0.2: U12.18@51.006,22.602 51.006,18.768 51.767,18.007 69.214,18.007 v1(69.748,18.543) v1(69.748,18.543) ; 69.405,18.197 ccw(c69.06,18.543) v1@69.548,18.543 ; 69.41,18.203 cw(c69.748,17.865) v1@69.748,18.343 ; v1(70.357,20.956) 70.874,21.472 J3.7@72.6,21.472 ; v1@70.357,21.156 ccw(c70.357,21.638) 70.699,21.297 ccw(c71.04,20.956) v1@70.557,20.956
  Bottom Layer w0.2: v1@69.606,18.684 ccw(c69.265,19.025) 69.748,19.025 ccw(c70.231,19.025) v1@69.889,18.684 ; v1(69.748,18.543) 69.748,20.346 v1(70.357,20.956) ; v1@70.157,20.956 cw(c69.675,20.956) 70.016,20.614 cw(c70.357,20.273) v1@70.357,20.756
M3V3: C21.1 C28.1 C44.1 C74.1 C75.1 J1.6 J3.9 J10.1 Q5.S R60.1 R61.1 U5.2 U12.26 UB1.8 | length 134.1
  Top Layer w0.2: U12.26@54.106,23.702 58.843,23.702 C74.1@58.862,23.683 ; 58.091,23.702 cw(c58.091,22.912) C74.1@58.65,23.471 ; 58.184,23.702 ccw(c58.184,24.361) C74.1@58.65,23.895
  Top Layer w0.3: J3.9@72.6,22.472 75.546,22.472 v1@75.92,22.099 ; 75.628,22.39 ccw(c75.971,22.733) v1@75.971,22.249
  Top Layer w0.5: U5.2@32.334,18.858 cw(c32.334,18.358) 32.688,18.711 cw(c33.042,19.065) U5.2@32.541,19.065 ; U5.2@32.334,19.065 C44.1@33.718,17.681 ; 33.17,18.23 cw(c32.162,17.222) C44.1@33.587,17.222 ; C28.1@33.612,15.168 ccw(c33.05,15.73) 33.845,15.73 ; C44.1@33.663,16.633 cw(c33.222,16.192) 33.845,16.192 cw(c34.468,16.192) C44.1@34.028,16.633 ; C28.1@33.718,15.012 33.845,15.139 33.845,15.875 ; C44.1@33.845,17.018 33.845,15.875 ; v1@34.976,15.966 Q5.S@36.119,15.966 ; v1(34.976,15.977) 33.947,15.977 33.845,15.875 ; Q5.S@35.972,15.82 ccw(c35.619,15.466) 35.619,15.966 ccw(c35.619,16.467) Q5.S@35.972,16.113 ; C75.1@58.851,22.073 58.862,22.084 v1(58.862,22.861) C74.1@58.862,23.683 ; v1(58.862,14.874) v1(58.862,16.953) ; v1(60.832,37.796) v1(64.515,37.796) ; J1.6@71.297,35.648 71.333,35.611 v1(75.742,35.611)
  Bottom Layer w0.5: v1(34.976,15.977) 36.067,14.885 58.851,14.885 v1(58.862,14.874) ; 55.702,39.951 cw(c58.628,39.951) J10.1@56.559,42.02 ; 55.702,41.158 cw(c57.421,41.158) J10.1@56.205,42.374 ; 55.785,41.841 ccw(c55.358,42.268) J10.1@55.961,42.268 ; J10.1@56.245,41.924 ccw(c56.129,41.331) 55.702,41.758 ; J10.1@56.311,42.368 55.702,41.758 ; v1@58.862,14.885 74.244,14.885 75.971,16.612 v1(75.971,22.099) 75.971,35.383 v1(75.742,35.611) 75.415,35.938 C21.1@69.621,35.938 ; v1(58.862,16.953) v1(58.862,22.861) ; v1(60.832,37.796) 56.438,37.796 55.702,38.532 55.702,41.758 ; R61.1@65.317,37.702 cw(c64.976,37.361) R61.1@65.458,37.361 ; 65.45,37.796 cw(c65.45,37.255) R61.1@65.9,37.555 ; R61.1@65.484,37.278 ccw(c64.516,36.632) v1(64.515,37.796) 65.224,37.796 R61.1@65.658,37.361 67.871,37.361 69.294,35.938 C21.1@69.621,35.938 ; R60.1@67.39,37.211 cw(c67.39,35.686) 68.468,36.764 ; 68.842,36.39 ccw(c69.571,37.119) C21.1@69.571,36.088 ; UB1.8@69.621,33.335 C21.1@69.621,35.938 ; 74.832,35.938 cw(c74.832,34.701) 75.707,35.576 cw(c75.07,34.939) 75.971,34.939
MOTO+: R55.2 U11.8 | length 3.5
  Bottom Layer w0.6: U11.8@70.987,7.823 73.381,7.823 R55.2@73.609,7.595 ; 72.767,7.823 cw(c72.767,6.804) R55.2@73.488,7.524
MOTO-: P3.1 U11.5 | length 11.5
  Bottom Layer w0.6: P3.1@67.459,4.535 ccw(c66.862,5.132) 67.706,5.132 ccw(c68.551,5.132) P3.1@67.954,4.535 ; P3.1@67.706,3.938 67.706,10.329 69.01,11.633 U11.5@70.987,11.633
NetC15_1: C15.1 P4.2 T1.3 | length 8.5
  Top Layer w0.6: C15.1@45.821,8.027 T1.3@48.64,8.027 48.64,5.579 P4.2@47.278,4.217 ; P4.2@47.278,4.567 ccw(c47.278,5.412) 47.876,4.814 ccw(c48.473,4.217) P4.2@47.628,4.217
NetC15_2: C15.2 P4.1 R43.1 | length 7.7
  Top Layer w0.6: R43.1@44.424,10.415 44.424,5.309 45.278,4.455 P4.1@45.278,4.217 ; 44.513,5.221 cw(c43.509,4.217) P4.1@44.928,4.217
NetC22_1: C22.1 UB1.1 Y1.2 | length 10.4
  Bottom Layer w0.254: Y1.2@68.125,24.918 69.57,24.918 69.621,24.867 ; Y1.2@68.354,24.69 cw(c68.905,24.138) 68.905,24.918 cw(c68.905,25.698) Y1.2@68.354,25.146 ; UB1.1@69.499,27.562 cw(c69.203,27.267) 69.621,27.267 cw(c70.039,27.267) UB1.1@69.743,27.562 ; 69.621,24.04 ccw(c70.623,24.04) C22.1@69.915,23.331 ; 69.621,24.653 ccw(c71.237,24.653) C22.1@70.094,23.511 ; UB1.1@69.621,28.135 69.621,24.867 ; C22.1@69.951,23.318 69.621,23.648 69.621,24.867